# EAGLE board MOL-v2-1_MOD-Actuators (EAGLE 8.2.2)
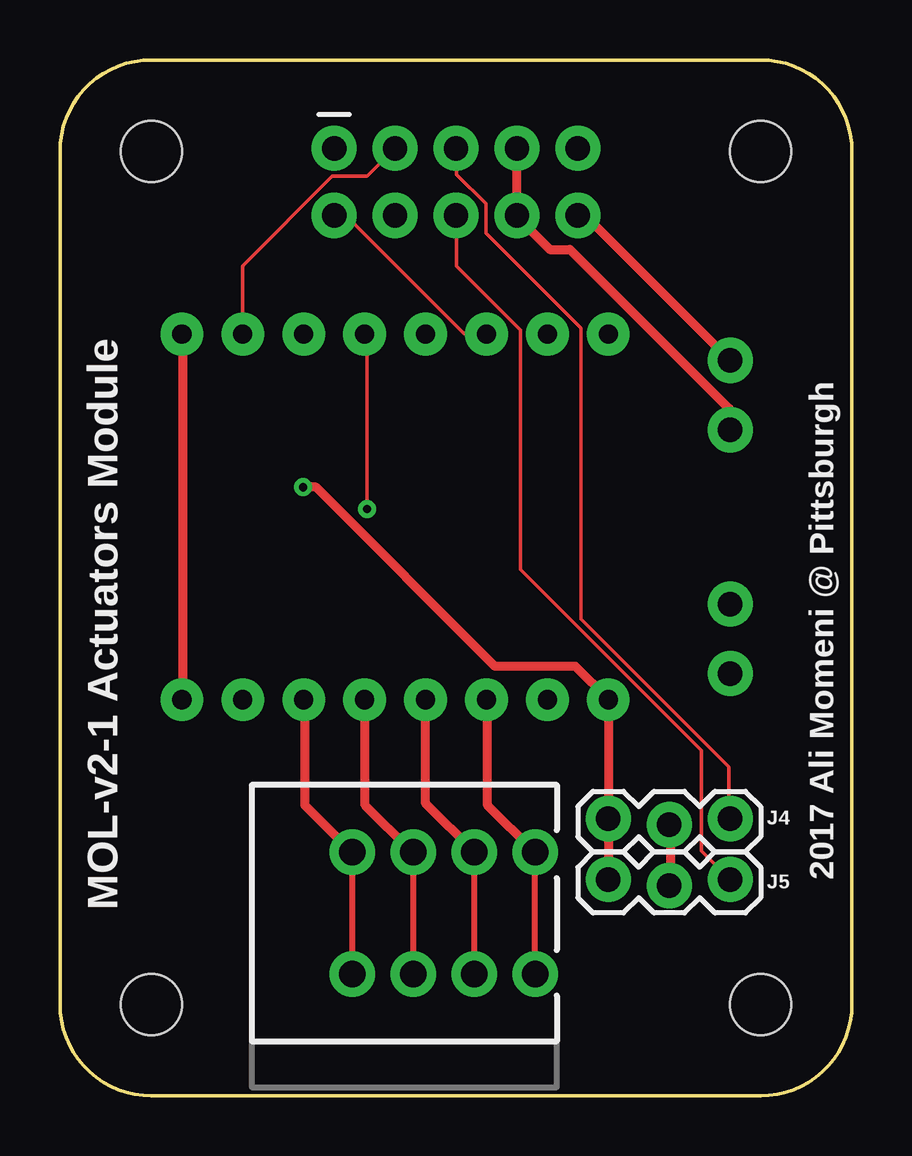
[diagram p0: board, top side]
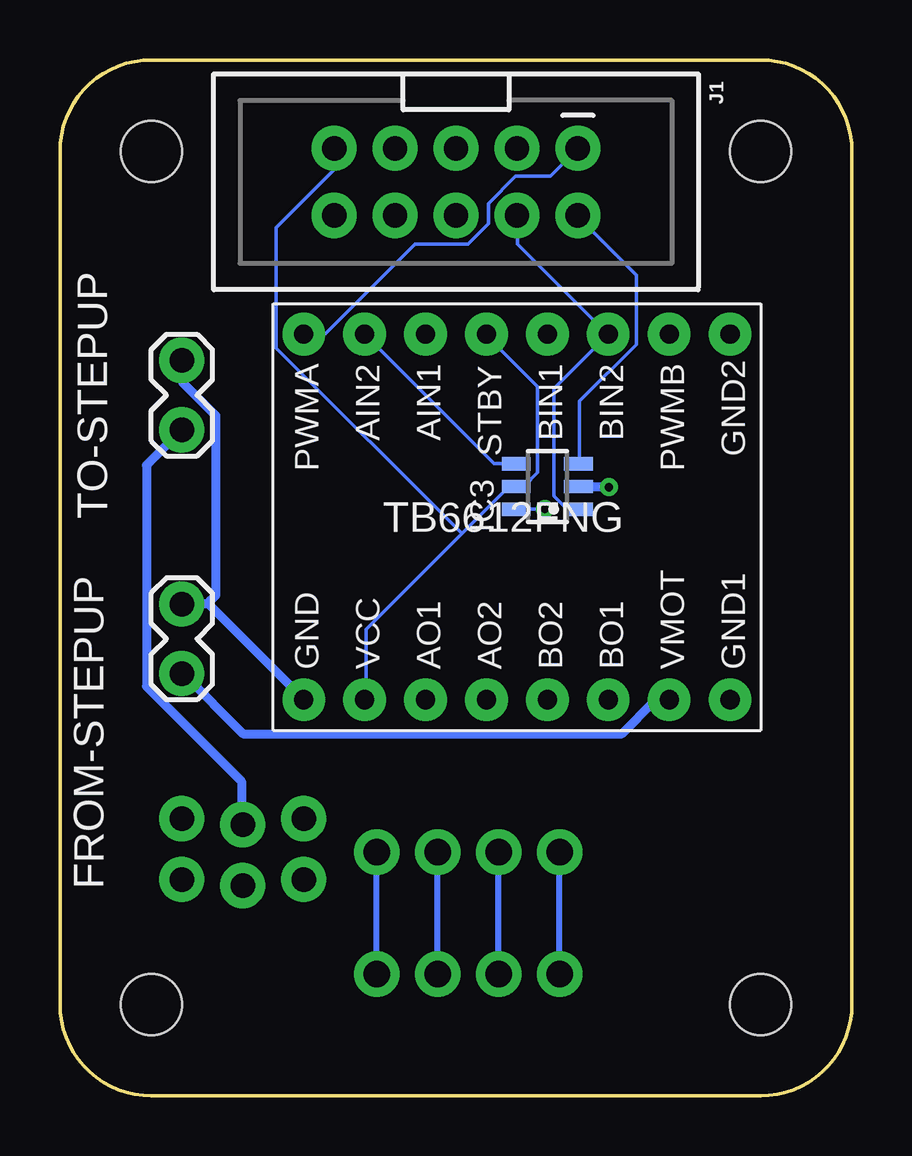
[diagram p1: board, bottom side, seen from below]

Size 33.02 x 43.18 mm. Coordinates in mm from the lower left corner, seen from the top.
Outline: 0,3.81 arc90 3.81,0 29.21,0 arc90 33.02,3.81 33.02,39.37 arc90 29.21,43.18 3.81,43.18 arc90 0,39.37 0,3.81
Copper layers (1*16): Top 0.035mm / dielectric 1.5mm / Bottom 0.035mm
Design rules "default": minimum track width 6mil, minimum drill 0.35mm, track to track 6mil, track to pad 6mil, pad to pad 6mil, via to via 6mil, smd to smd 6mil, copper to edge 40mil, drill to drill 6mil, minimum pad ring 10mil, minimum via ring 8mil, stop-mask expansion 4mil, vias tented up to drill 0mil, thermal gap 10mil
Net classes: 2 Power: width 0.381 mm, clearance 0.279 mm
Holes 2.54 mm at 3.81,39.37 29.21,39.37 29.21,3.81 3.81,3.81

## Footprints (pad centres in the part's own frame; a part is rotated, then mirrored left to right if it is on the bottom)
1X02_LOCK = drill 1.016 pad 1.88: 1 -0.178,0; 2 2.718,0
SOT23-6 = smd 0.55 x 1.2: 1 -0.95,-1.3; 2 0,-1.3; 3 0.95,-1.3; 4 0.95,1.3; 5 0,1.3; 6 -0.95,1.3
2X5-SHROUDED_LOCK = drill 1.016 pad 1.88: 1 -1.397,5.08; 2 1.397,5.08; 3 -1.397,2.54; 4 1.397,2.54; 5 -1.397,0; 6 1.397,0; 7 -1.397,-2.54; 8 1.397,-2.54; 9 -1.397,-5.08; 10 1.397,-5.08
1X03_LOCK@1 = drill 1.016 pad 1.88: 1 0,0.127; 2 2.54,-0.127; 3 5.08,0.127
SPRINGTERMINAL-2.54MM-4 = drill 1.1 pad 1.9: 1 7.62,-2.54; 2 5.08,-2.54; 3 2.54,-2.54; 4 0,-2.54; P$1 7.62,2.54; P$2 5.08,2.54; P$3 2.54,2.54; P$4 0,2.54
POLOLU_TB6612FNG = drill 0.8 pad 1.778: AIN1 7.62,3.81; AIN2 7.62,6.35; AO1 -7.62,3.81; AO2 -7.62,1.27; BIN1 7.62,-1.27; BIN2 7.62,-3.81; BO1 -7.62,-3.81; BO2 -7.62,-1.27; GND -7.62,8.89; GND1 -7.62,-8.89; GND2 7.62,-8.89; PWMA 7.62,8.89; PWMB 7.62,-6.35; STBY 7.62,1.27; VCC -7.62,6.35; VMOT -7.62,-6.35

## Placement (x,y rotation side)
FROM-STEPUP  [1X02_LOCK]  27.94,20.32 270 bottom
IC3  SN74LVC2G04DBV  [SOT23-6]  12.7,25.4 90 bottom
J1  ACTUATORS  [2X5-SHROUDED_LOCK]  16.51,38.1 270 bottom
J4  SERVO 1  [1X03_LOCK@1]  22.86,11.43 0 top
J5  SERVO 2  [1X03_LOCK@1]  22.86,8.89 0 top
MOTORS1  [SPRINGTERMINAL-2.54MM-4]  12.19,7.62 0 top
TO-STEPUP  [1X02_LOCK]  27.94,27.94 90 bottom
U$7  POLOLU_TB6612FNG  [POLOLU_TB6612FNG]  13.97,24.13 90 bottom

## Library data of the parts
FROM-STEPUP MOTORS1 U$7 = CMU-ArtFab
IC3 = 74LV
J1 = SparkFun-Connectors; PROD_ID: CONN-08671; SF_ID: PRT-08506
J4 J5 = SparkFun-Connectors
TO-STEPUP = CMU-ArtFab; GND: GND

## Nets
+3V3: IC3.5 J1.9 U$7.STBY U$7.VCC
+5V [Power]: J1.7 J1.8 J4.2 J5.2 TO-STEPUP.1
GND [Power]: FROM-STEPUP.1 IC3.2 J1.10 J4.1 J5.1 TO-STEPUP.2 U$7.GND
GND_MOT [Power]: U$7.GND1 U$7.GND2
M_AIN: IC3.3 J1.2 U$7.AIN1
M_BIN: IC3.1 J1.4 U$7.BIN2
M_PWMA: J1.1 U$7.PWMA
M_PWMB: J1.3 U$7.PWMB
N$1 [Power]: MOTORS1.P$1 U$7.AO1
N$2 [Power]: MOTORS1.P$2 U$7.AO2
N$3 [Power]: MOTORS1.P$3 U$7.BO2
N$4 [Power]: MOTORS1.P$4 U$7.BO1
N$5: IC3.6 U$7.BIN1
N$6: IC3.4 U$7.AIN2
S1: J1.5 J4.3
S2: J1.6 J5.3
VMOT [Power]: FROM-STEPUP.2 U$7.VMOT

## Tracks (layer width: path | path; a pad name or v marks a point on that pad's centre or on a via)
+3V3
  Bottom 0.152: U$7.STBY 15.24,31.7 13.11,29.57 13.11,25.98 13.64,25.45 13.95,25.45 IC3.5 14.02,25.38 14.33,25.38 16.27,23.43 | 16.27,23.43 20.27,19.43 20.27,16.54 U$7.VCC | 16.27,23.43 24,31.17 24,36.2 21.64,38.56 21.64,39.47 J1.9
+5V
  Top 0.381: J5.2 25.45,8.76 25.45,11.28 J4.2 | TO-STEPUP.1 27.89,27.81 27.89,28.65 21.26,35.28 20.42,35.28 19.05,36.65 J1.8 J1.7
  Bottom 0.381: TO-STEPUP.1 29.41,26.29 29.41,17.07 25.45,13.11 25.45,11.35 J4.2
GND  (via drill 0.35)
  Top 0.381: TO-STEPUP.2 21.95,36.65 21.64,36.65 J1.10 | J5.1 J4.1 U$7.GND 22.86,16.54 21.49,17.91 18.14,17.91 10.67,25.38 v10.13,25.38
  Bottom 0.381: v10.13,25.38 11.35,25.38 IC3.2 | 26.82,20.5 FROM-STEPUP.1 | 26.82,20.5 22.86,16.54 U$7.GND | TO-STEPUP.2 27.89,30.63 27.89,29.72 26.52,28.35 26.52,20.88 26.75,20.65 26.82,20.5
GND_MOT
  Top 0.381: U$7.GND1 5.11,16.54 5.11,31.7 U$7.GND2
M_AIN
  Top 0.152: U$7.AIN1 17.75,31.77 16.84,31.77 11.96,36.65 11.43,36.65 J1.2
  Bottom 0.152: IC3.3 11.35,26.36 11.35,28.96 8.99,31.32 8.99,34.21 11.43,36.65 J1.2
M_BIN
  Bottom 0.152: IC3.1 11.43,24.46 11.89,24.46 12.42,24.99 12.42,29.49 U$7.BIN2 10.21,31.77 13.95,35.51 13.95,36.65 J1.4
M_PWMA
  Bottom 0.152: U$7.PWMA 22.86,31.77 21.95,31.77 18.21,35.51 16,35.51 15.16,36.35 15.16,37.19 14.02,38.33 12.57,38.33 11.43,39.47 J1.1
M_PWMB
  Top 0.152: U$7.PWMB 7.62,34.59 11.35,38.33 12.8,38.33 J1.3
N$1
  Top 0.381: U$7.AO1 17.83,16.46 17.83,12.12 19.74,10.21 MOTORS1.P$1
N$2
  Top 0.381: U$7.AO2 15.24,12.19 MOTORS1.P$2
N$3
  Top 0.381: U$7.BO2 12.72,16.46 12.72,12.12 14.63,10.21 MOTORS1.P$3
N$4
  Top 0.381: U$7.BO1 10.21,16.46 10.21,12.12 12.12,10.21 MOTORS1.P$4
N$5  (via drill 0.35)
  Top 0.152: v12.8,24.46 12.8,31.62 12.72,31.7 U$7.BIN1
  Bottom 0.152: v12.8,24.46 13.95,24.46 IC3.6
N$6
  Bottom 0.152: U$7.AIN2 14.94,26.36 14.02,26.36 IC3.4
S1
  Top 0.152: J1.5 16.54,39.47 16.54,38.41 17.75,37.19 17.75,35.97 21.72,32 21.72,19.89 27.89,13.72 27.89,11.58 J4.3
S2
  Top 0.152: J5.3 26.75,10.21 26.75,14.4 19.2,21.95 19.2,31.93 16.54,34.59 16.54,36.65 J1.6
VMOT
  Bottom 0.381: U$7.VMOT 7.62,16.46 8.23,16.46 9.6,15.09 25.38,15.09 27.89,17.6 FROM-STEPUP.2

## Text on the board
tNames: 2017 Ali Momeni @ Pittsburgh | MOL-v2-1 Actuators Module